# Altium PCB drive.PcbDoc
Units mil, origin at the board's own origin, x right, y up, seen from the top; angles counter-clockwise.
Board outline 6000 x 4000 mil, 2 copper layers (Top Layer, Bottom Layer); 73 components, 49 nets, 211 pads, 63 vias.
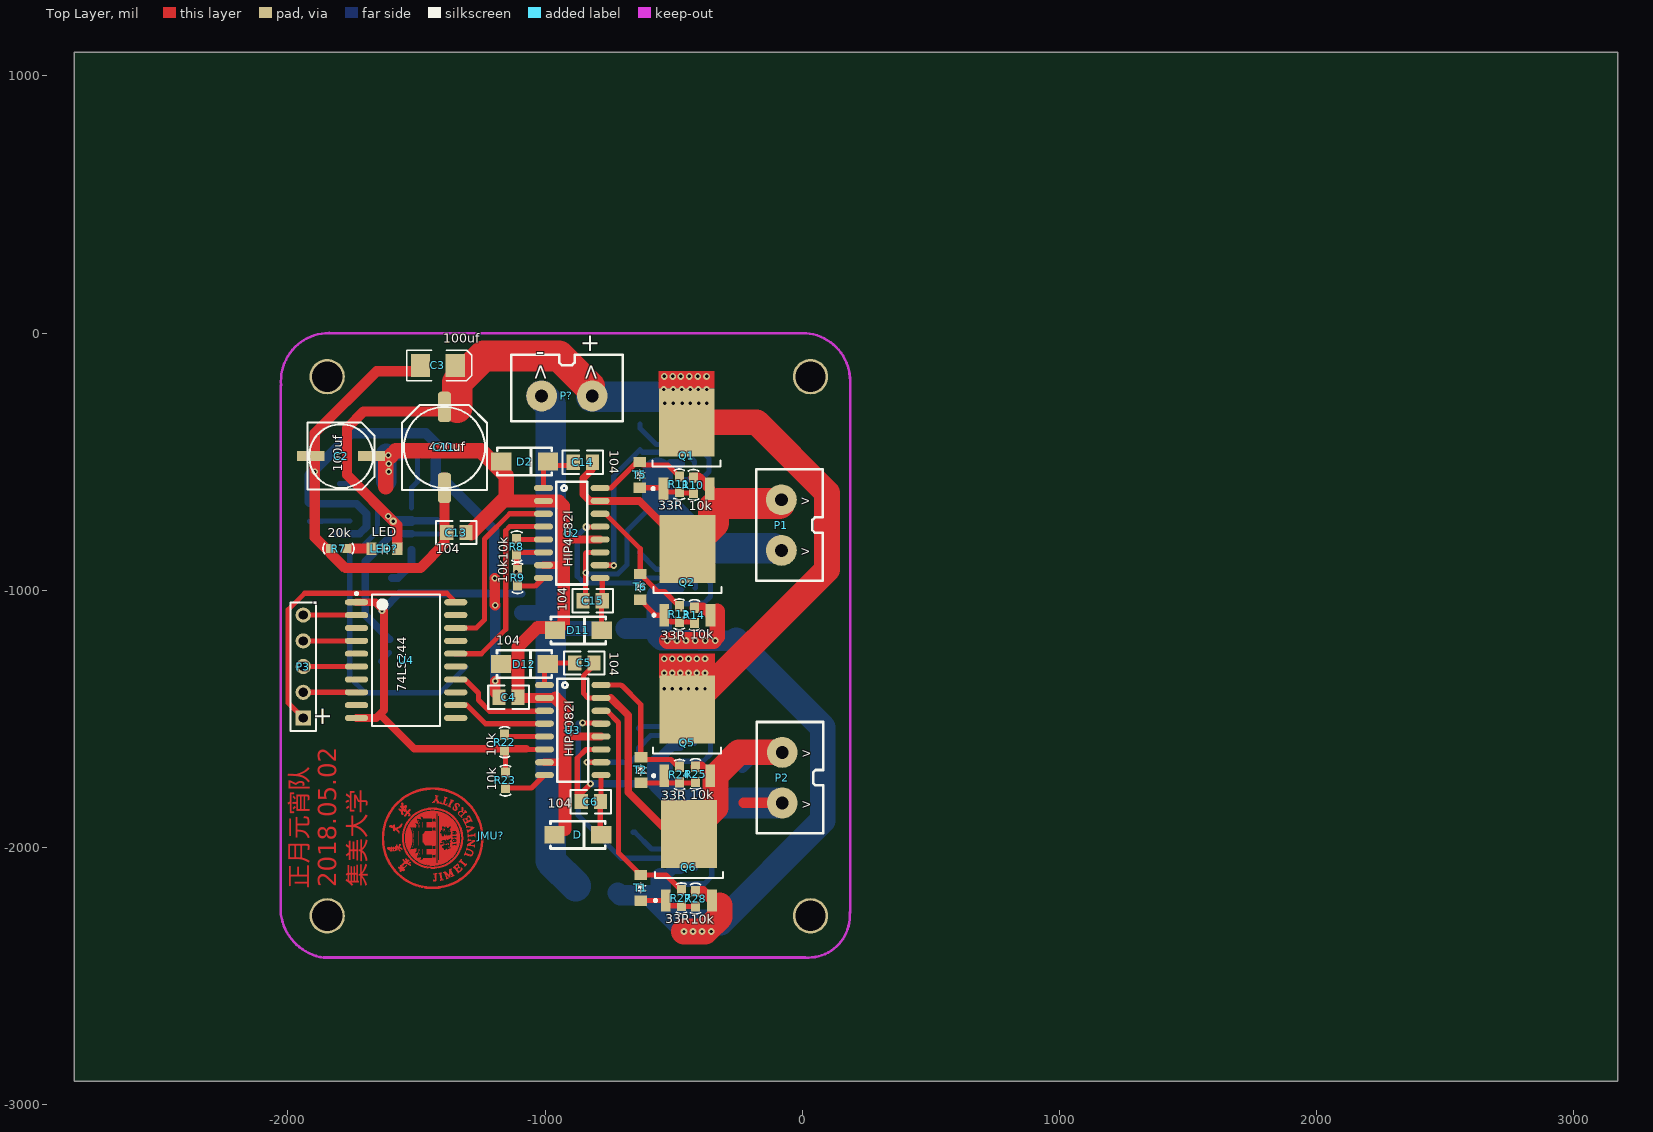
[diagram p0: Top Layer view]
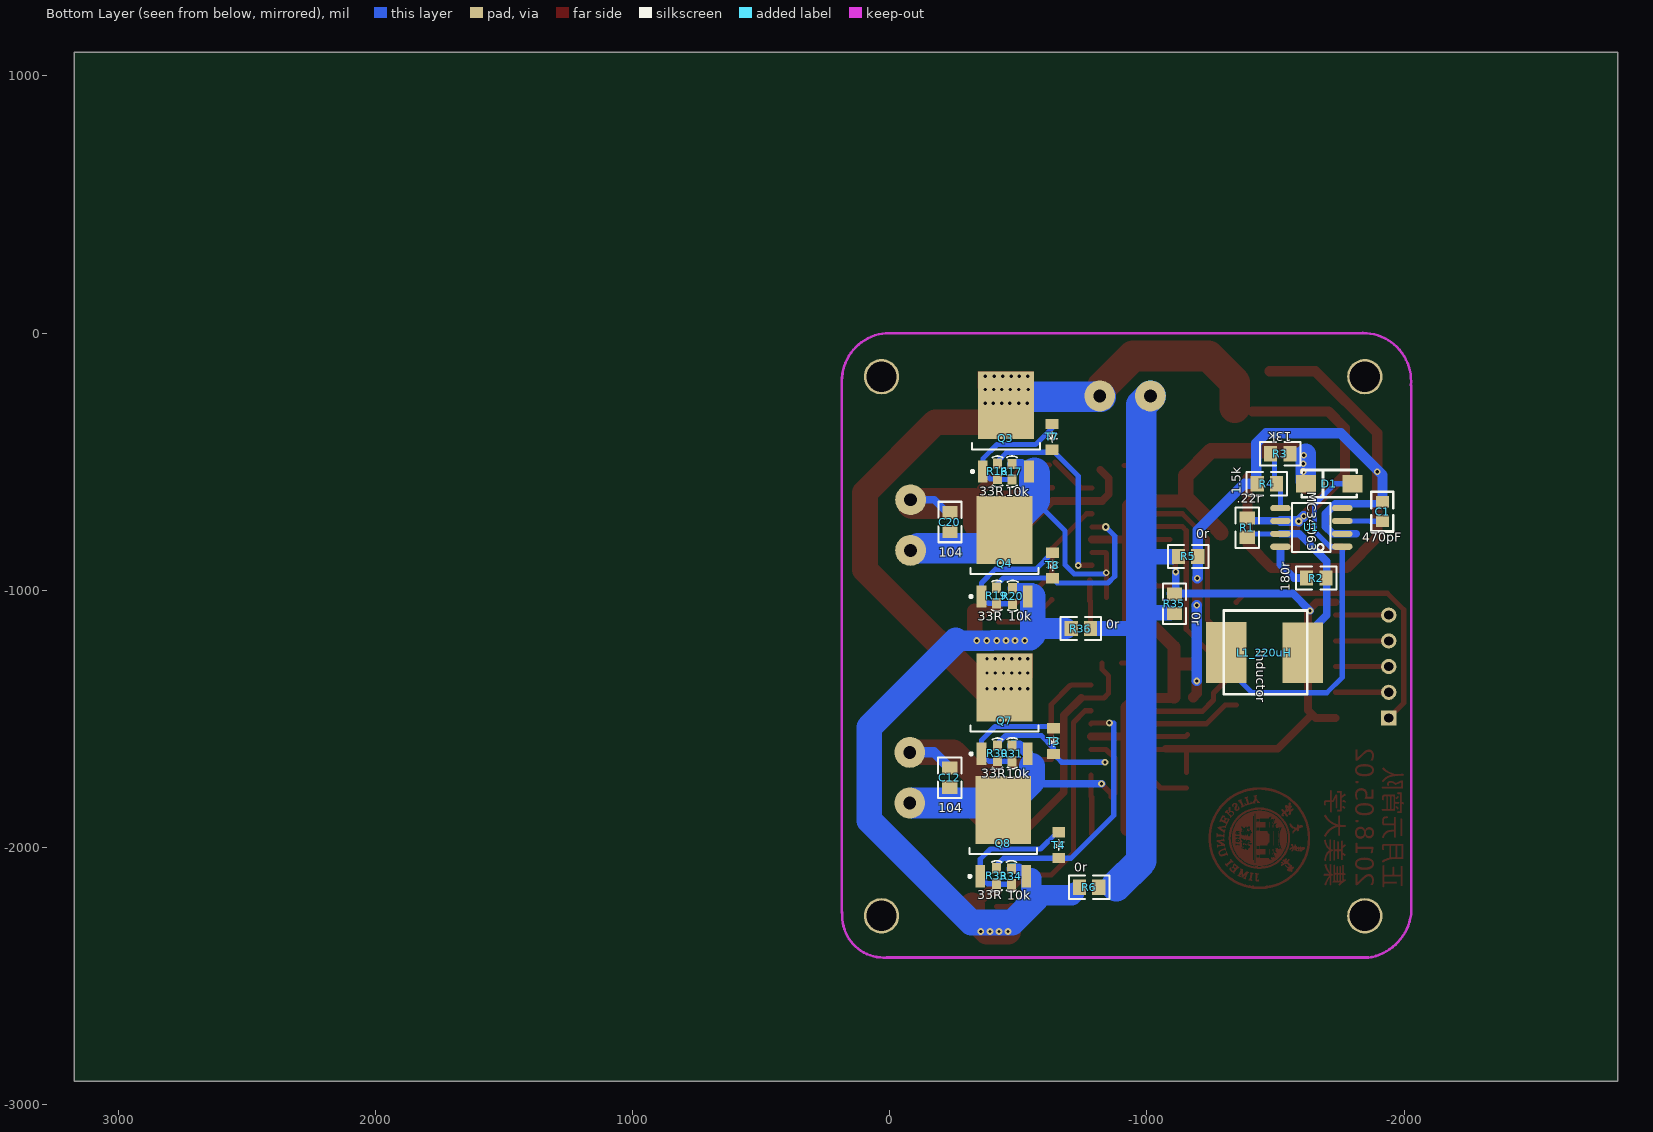
[diagram p1: Bottom Layer view, seen from below]
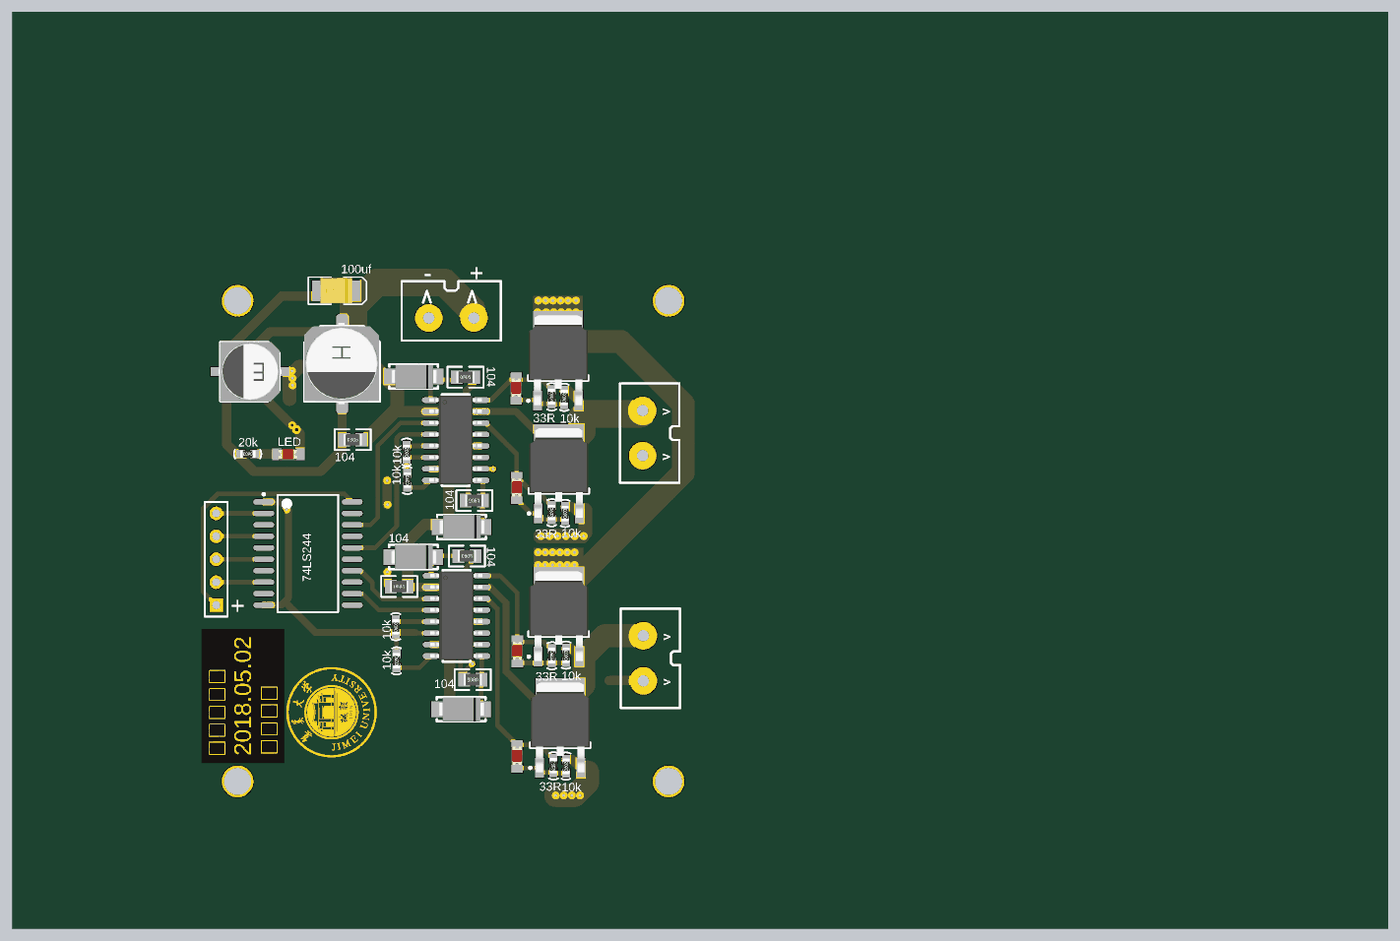
[diagram p2: 3D render of the assembled board from above, using the file's embedded part models]
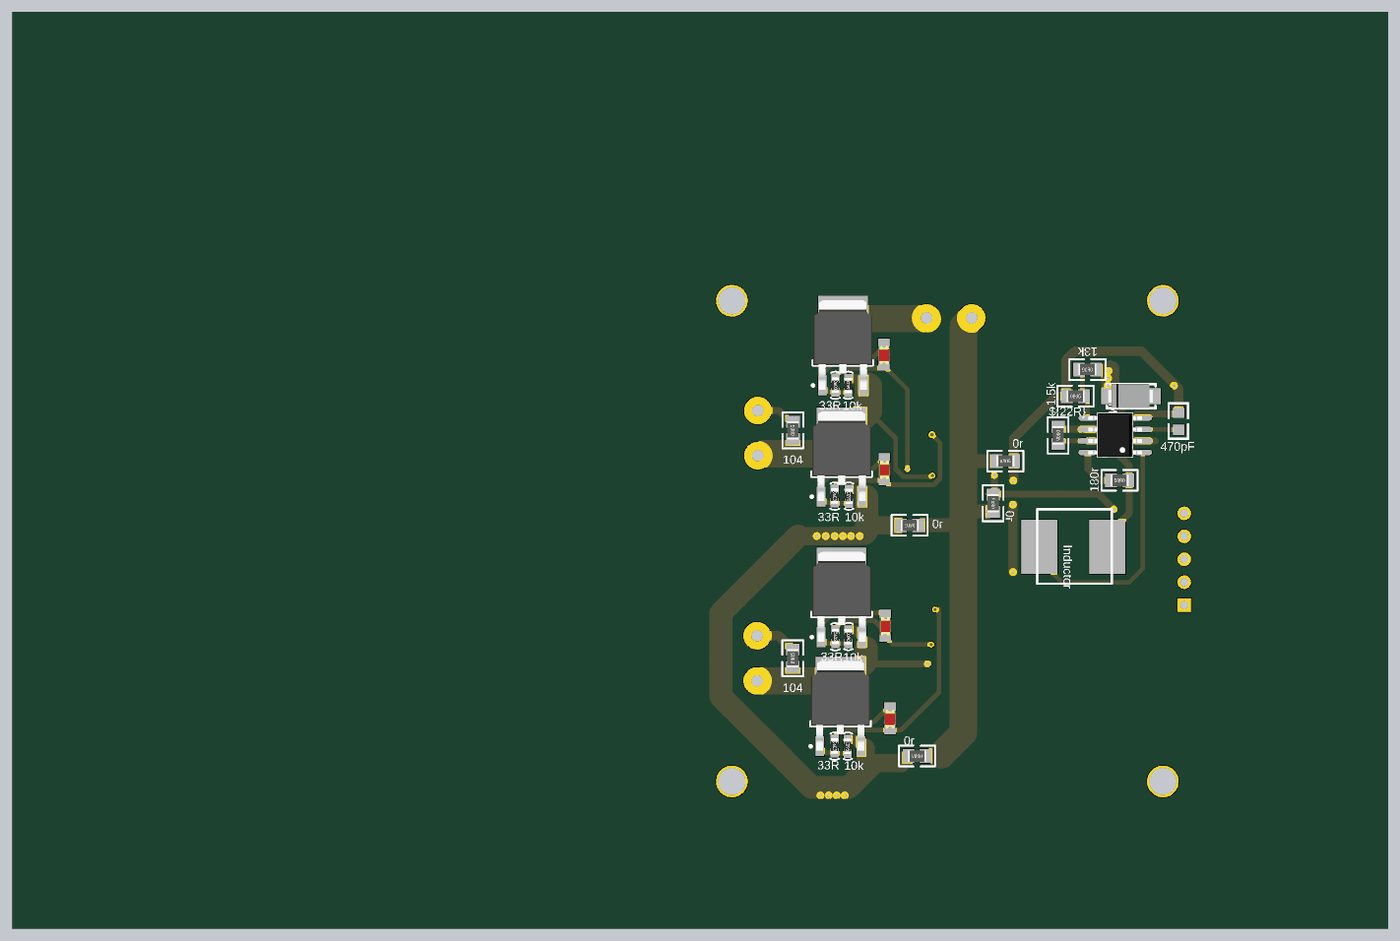
[diagram p3: 3D render of the assembled board from below, using the file's embedded part models]

## Layer stack, top to bottom
Top Solder: solder mask 0.4, Solder Resist, Dk 3.5
Top Layer: signal copper 1.4
Dielectric 1: dielectric 12.6, FR-4, Dk 4.8
Bottom Layer: signal copper 1.4
Bottom Solder: solder mask 0.4, Solder Resist, Dk 3.5

## Board outline
-2830,-2908 3170,-2908 3170,1092 -2830,1092

## Design rules (kind name [scope] priority, off if disabled: settings)
Clearance [All] p1: gap=10
PolygonConnect [All] p1: connectstyle=Relief reliefconductorwidth=10 reliefentries=4 polygonreliefangle="90 Angle" airgapwidth=10
RoutingVias [All] p1: holewidth=28 width=50 viastyle="Through Hole" minholewidth=28 minwidth=50 maxholewidth=28 maxwidth=50
SolderMaskExpansion [All] p1: expansion=4
Width [All] p1: maxlimit=150 minlimit=10 preferedwidth=20 minimp=50.000000 maximp=50.000000 favimp=50.000000
30 further rules are at their usual default settings.

## Components (designator, comment, footprint, x,y, rotation, side; value= is the part's Value field where it differs from the comment)
C1 "470pF" 0805#1 -1916,-731 r90 bottom
C2 "100uf" ED6.3 -1793,-478 r180 top
C3 "100uf" "pol cap(10uF)" -1537,-55 r0 top
C4 "104" 0805#2 -1142,-1410 r0 top
C5 "104" 0805#2 -847,-1277 r0 top
C6 "104" 0805#2 -822,-1826 r180 top
C11 "470uf" ED8 -1391,-444 r270 top
C12 "104" 0805#2 -228,-1728 r90 bottom
C13 "104" 0805#2 -1345,-770 r0 top
C14 "104" 0805#2 -853,-497 r0 top
C15 "104" 0805#2 -815,-1045 r180 top
C20 "104" 0805#2 -229,-734 r90 bottom
D "二极管" 二极管 -868,-1950 r0 top
D1 "二极管" 二极管 -1704,-585 r0 bottom
D2 "D" 二极管 -1075,-499 r0 top
D11 "二极管" 二极管 -866,-1155 r0 top
D12 "二极管" 二极管 -1076,-1286 r0 top
JMU? "LOGO(JMU)" JMU_logo（1） -1210,-1954 r90 top
L1_220uH "Inductor" 电感8*8 -1605,-1242 r270 bottom
LED? "LED" LED(0805) -1625,-838 r180 top
P1 "接线端子" 接线端子 -186,-966 r90 top
P2 "" 接线端子 -183,-1948 r90 top
P3 "Header 5" HDR1X5 -1940,-1496 r90 top
P? "电源接线端子" 接线端子 -695,-349 r180 top
Q1 "IR7843" "TO-252  mos管" -449.49,-431.19 r90 top
Q2 "IR7843" "TO-252  mos管" -446.49,-923.19 r90 top
Q3 "IR7843" "TO-252  mos管" -451.76,-364.77 r90 bottom
Q4 "IR7843" "TO-252  mos管" -446.49,-850.19 r90 bottom
Q5 "IR7843" "TO-252  mos管" -447.49,-1547.19 r90 top
Q6 "IR7843" "TO-252  mos管" -440.49,-2032.19 r90 top
Q7 "IR7843" "TO-252  mos管" -446.49,-1462.19 r90 bottom
Q8 "IR7843" "TO-252  mos管" -441.49,-1938.19 r90 bottom
R1 ".22r" 0805#2 -1395,-756 r270 bottom
R2 "180r" 0805#2 -1658,-957 r0 bottom
R3 "13k" 0805#2 -1518,-474 r0 bottom
R4 "1.5k" 0805#2 -1466,-580 r180 bottom
R5 "0r" 0805#2 -1160,-863 r180 bottom
R6 "0r" 0805#2 -775,-2159 r0 bottom
R7 "20k" 0603 -1797,-837 r180 top
R8 "10k" 0603 -1110,-835 r90 top
R9 "10k" 0603 -1107,-946 r270 top
R10 "10k" 0603 -423,-596 r90 top
R11 "33R" 0603 -478,-582 r270 top
R13 "33R" 0603 -478,-1087 r270 top
R14 "10k" 0603 -419,-1102 r90 top
R16 "33R" 0603 -419.28,-531.58 r270 bottom
R17 "10k" 0603 -475.28,-543.58 r90 bottom
R19 "33R" 0603 -416,-1015 r270 bottom
R20 "10k" 0603 -478,-1027 r90 bottom
R22 "10k" 0603 -1157,-1596 r90 top
R23 "10k" 0603 -1154,-1733 r270 top
R24 "33R" 0603 -477,-1711 r270 top
R25 "10k" 0603 -415,-1720 r90 top
R27 "33R" 0603 -470,-2191 r270 top
R28 "10k" 0603 -415,-2204 r90 top
R30 "33R" 0603 -419,-1628 r270 bottom
R31 "10k" 0603 -476,-1639 r90 bottom
R33 "33R" 0603 -416,-2105 r270 bottom
R34 "10k" 0603 -473,-2117 r90 bottom
R35 "0r" 0805#2 -1102,-1052 r90 bottom
R36 "0r" 0805#2 -743,-1153 r0 bottom
T1 "二极管" LED(0805) -628,-2156 r90 top
T2 "二极管" LED(0805) -627,-1698 r90 top
T3 "二极管" LED(0805) -637,-1586 r270 bottom
T4 "二极管" LED(0805) -657,-1990 r270 bottom
T5 "二极管" LED(0805) -632,-551 r90 top
T6 "二极管" LED(0805) -630,-986 r90 top
T7 "二极管" LED(0805) -631,-403 r270 bottom
T8 "二极管" LED(0805) -633,-903 r270 bottom
U1 "MC34063" SO8NB -1639,-755 r90 bottom
U2 "HIP4082I" HIP4082I -896,-762 r0 top
U3 "HIP4082I" HIP4082I -892.47,-1528 r0 top
U4 "74LS244" 74LS244D -1540,-1271 r0 top

## Footprints (in the part's own frame and the unit in brackets; to place one, negate y for a bottom-side part, rotate by r counter-clockwise, add the part's x,y. Pads: shape width x height; smd on the part's side, far side on the other; paste and mask are expansions set on the pad)
74LS244D [mm] "SOP-20"
  oval 2.3x0.6 smd: 1(-4.9,5.715) 2(-4.9,4.445) 3(-4.9,3.175) 4(-4.9,1.905) 5(-4.9,0.635) 6(-4.9,-0.635) 7(-4.9,-1.905) 8(-4.9,-3.175) 9(-4.9,-4.445) 10(-4.9,-5.715) 11(4.9,-5.715) 12(4.9,-4.445) 13(4.9,-3.175) 14(4.9,-1.905) 15(4.9,-0.635) 16(4.9,0.635) 17(4.9,1.905) 18(4.9,3.175) 19(4.9,4.445) 20(4.9,5.715)
  silkscreen extent -5.02,-6.5 3.35,6.69, body extent -3.8,-6.5 3.8,6.5, height 2.65
0603 [mil]
  rect 40x35 smd: 1(-25,0) 2(35,0)
  silkscreen extent -54,-20 66,20, body extent -28,-16 38,16, height 22
0805#1 [mil]
  rect 45x50 smd: 1(0,0) 2(75,0)
  silkscreen extent -40,-41 115,44
0805#2 [mil]
  rect 51.18x59.06 smd: 1(-37.4,-5) 2(37.4,-5)
  silkscreen extent -79,-50 79,40, body extent -39,-30 39,20, height 22
ED6.3 [mm]
  rect 2.7x1 smd: 1(-3,0) 2(3,0)
  silkscreen extent -3.3,-3.3 3.3,3.3, body extent -3.5,-3.3 3.5,3.3, height 5.2
ED8 [mm]
  rrect50% 3x1.3 smd: 1(-4,0) 2(4,0)
  silkscreen extent -4.2,-4.2 4.2,4.2, body extent -4.52,-4.22 4.48,4.08, height 10.5
HDR1X5 [mm] "Connector; Header; 5 Position"
  rect 1.5x1.5 hole 0.9: 1(0,0)
  round 1.5 hole 0.9: 2(2.54,0) 3(5.08,0) 4(7.62,0) 5(10.16,0)
  silkscreen extent -1.27,-1.27 11.43,1.27
HIP4082I [mil]
  oval 74x24 smd: 1(-110,160) 2(-110,110) 3(-110,60) 4(-110,10) 5(-110,-40) 6(-110,-90) 7(-110,-140) 8(-110,-190) 9(110,-190) 10(110,-140) 11(110,-90) 12(110,-40) 13(110,10) 14(110,60) 15(110,110) 16(110,160)
  silkscreen extent -60,-215 60,185, body extent -115,-207 113,179, height 69
JMU_logo（1） [mil]
  Top Layer region: 917 vertices and 1 holes, not listed, extent -205.79,30.64 187.21,423.64
  Top Layer region: 557 vertices and 1 holes, not listed, extent -127.79,108.64 109.21,345.64
  Top Layer region: 309 vertices and 19 holes, not listed, extent -115.79,217.64 97.21,333.64
  Top Layer region: 261 vertices and 22 holes, not listed, extent -114.79,120.64 96.21,214.64
  Top Layer region: 251 vertices and 0 holes, not listed, extent 75.21,313.64 128.21,352.64
  Top Layer region: 219 vertices and 1 holes, not listed, extent -138.79,311.64 -91.79,360.64
  Top Layer region: 241 vertices and 4 holes, not listed, extent -60.79,345.64 -33.79,402.64
  Top Layer region: 155 vertices and 0 holes, not listed, extent 10.21,345.64 47.21,395.64
  Top Layer region: 195 vertices and 0 holes, not listed, extent -168.79,142.64 -127.79,185.64
  Top Layer region: 139 vertices and 1 holes, not listed, extent 71.21,93.64 111.21,127.64
  Top Layer region: -37.79,91.64 -32.79,91.64 -32.79,90.64 -31.79,90.64 -31.79,88.64 -30.79,88.64 -30.79,86.64 -29.79,86.64 -29.79,85.64 -28.79,85.64 -28.79,83.64 -27.79,83.64 -27.79,82.64 -26.79,82.64 -26.79,80.64 -25.79,80.64 -25.79,78.64 -24.79,78.64 -24.79,77.64 -23.79,77.64 -23.79,75.64 -22.79,75.64 -22.79,73.64 -21.79,73.64 -21.79,72.64 -20.79,72.64 -20.79,70.64 -19.79,70.64 -19.79,78.64 -18.79,78.64 -18.79,87.64 -21.79,87.64 -21.79,89.64 -14.79,89.64 -14.79,88.64 -10.79,88.64 -10.79,87.64 -11.79,87.64 -11.79,86.64 -14.79,86.64 -14.79,84.64 -15.79,84.64 -15.79,78.64 -16.79,78.64 -16.79,70.64 -17.79,70.64 -17.79,62.64 -18.79,62.64 -18.79,60.64 -20.79,60.64 -20.79,62.64 -21.79,62.64 -21.79,63.64 -22.79,63.64 -22.79,65.64 -23.79,65.64 -23.79,66.64 -24.79,66.64 -24.79,68.64 -25.79,68.64 -25.79,70.64 -26.79,70.64 -26.79,71.64 -27.79,71.64 -27.79,73.64 -28.79,73.64 -28.79,74.64 -29.79,74.64 -29.79,76.64 -30.79,76.64 -30.79,78.64 -31.79,78.64 -31.79,80.64 -32.79,80.64 -32.79,81.64 -33.79,81.64 -33.79,83.64 -34.79,83.64 -34.79,79.64 -35.79,79.64 -35.79,71.64 -36.79,71.64 -36.79,64.64 -33.79,64.64 -33.79,62.64 -41.79,62.64 -41.79,63.64 -44.79,63.64 -44.79,64.64 -43.79,64.64 -43.79,65.64 -40.79,65.64 -40.79,66.64 -39.79,66.64 -39.79,71.64 -38.79,71.64 -38.79,79.64 -37.79,79.64 -37.79,86.64 -36.79,86.64 -36.79,87.64 -37.79,87.64 -37.79,89.64 -39.79,89.64 -39.79,90.64 -40.79,90.64 -40.79,92.64 -37.79,92.64
  Top Layer region: 177 vertices and 0 holes, not listed, extent 43.21,73.64 78.21,109.64
  Top Layer region: 215 vertices and 0 holes, not listed, extent -145.79,111.64 -108.79,148.64
  Top Layer region: -73.79,103.64 -71.79,103.64 -71.79,102.64 -68.79,102.64 -68.79,101.64 -66.79,101.64 -66.79,100.64 -63.79,100.64 -63.79,99.64 -62.79,99.64 -62.79,97.64 -64.79,97.64 -64.79,98.64 -66.79,98.64 -66.79,97.64 -67.79,97.64 -67.79,95.64 -68.79,95.64 -68.79,92.64 -69.79,92.64 -69.79,89.64 -70.79,89.64 -70.79,87.64 -71.79,87.64 -71.79,84.64 -72.79,84.64 -72.79,81.64 -73.79,81.64 -73.79,76.64 -72.79,76.64 -72.79,75.64 -71.79,75.64 -71.79,74.64 -70.79,74.64 -70.79,73.64 -68.79,73.64 -68.79,72.64 -62.79,72.64 -62.79,73.64 -61.79,73.64 -61.79,74.64 -60.79,74.64 -60.79,75.64 -59.79,75.64 -59.79,76.64 -58.79,76.64 -58.79,78.64 -57.79,78.64 -57.79,81.64 -56.79,81.64 -56.79,84.64 -55.79,84.64 -55.79,86.64 -54.79,86.64 -54.79,89.64 -53.79,89.64 -53.79,93.64 -54.79,93.64 -54.79,94.64 -55.79,94.64 -55.79,96.64 -53.79,96.64 -53.79,95.64 -50.79,95.64 -50.79,94.64 -48.79,94.64 -48.79,93.64 -45.79,93.64 -45.79,91.64 -49.79,91.64 -49.79,90.64 -50.79,90.64 -50.79,88.64 -51.79,88.64 -51.79,86.64 -52.79,86.64 -52.79,83.64 -53.79,83.64 -53.79,80.64 -54.79,80.64 -54.79,78.64 -55.79,78.64 -55.79,76.64 -56.79,76.64 -56.79,74.64 -57.79,74.64 -57.79,72.64 -59.79,72.64 -59.79,71.64 -60.79,71.64 -60.79,70.64 -62.79,70.64 -62.79,69.64 -68.79,69.64 -68.79,70.64 -71.79,70.64 -71.79,71.64 -73.79,71.64 -73.79,72.64 -75.79,72.64 -75.79,73.64 -76.79,73.64 -76.79,74.64 -77.79,74.64 -77.79,76.64 -78.79,76.64 -78.79,83.64 -77.79,83.64 -77.79,86.64 -76.79,86.64 -76.79,89.64 -75.79,89.64 -75.79,91.64 -74.79,91.64 -74.79,94.64 -73.79,94.64 -73.79,97.64 -72.79,97.64 -72.79,101.64 -74.79,101.64 -74.79,104.64 -73.79,104.64
  Top Layer region: 130.21,227.64 131.21,227.64 131.21,224.64 132.21,224.64 132.21,223.64 134.21,223.64 134.21,222.64 135.21,222.64 135.21,221.64 136.21,221.64 136.21,220.64 137.21,220.64 137.21,219.64 139.21,219.64 139.21,218.64 140.21,218.64 140.21,217.64 141.21,217.64 141.21,216.64 142.21,216.64 142.21,215.64 144.21,215.64 144.21,214.64 152.21,214.64 152.21,213.64 154.21,213.64 154.21,214.64 155.21,214.64 155.21,217.64 157.21,217.64 157.21,212.64 156.21,212.64 156.21,204.64 154.21,204.64 154.21,207.64 153.21,207.64 153.21,208.64 148.21,208.64 148.21,209.64 143.21,209.64 143.21,208.64 141.21,208.64 141.21,207.64 139.21,207.64 139.21,206.64 137.21,206.64 137.21,205.64 135.21,205.64 135.21,204.64 134.21,204.64 134.21,203.64 132.21,203.64 132.21,202.64 130.21,202.64 130.21,201.64 129.21,201.64 129.21,200.64 128.21,200.64 128.21,198.64 126.21,198.64 126.21,206.64 127.21,206.64 127.21,211.64 129.21,211.64 129.21,208.64 131.21,208.64 131.21,209.64 133.21,209.64 133.21,210.64 135.21,210.64 135.21,211.64 137.21,211.64 137.21,212.64 139.21,212.64 139.21,213.64 140.21,213.64 140.21,214.64 139.21,214.64 139.21,215.64 138.21,215.64 138.21,216.64 136.21,216.64 136.21,217.64 135.21,217.64 135.21,218.64 134.21,218.64 134.21,219.64 132.21,219.64 132.21,220.64 130.21,220.64 130.21,218.64 128.21,218.64 128.21,224.64 129.21,224.64 129.21,228.64 130.21,228.64
  Top Layer region: 106.21,148.64 108.21,148.64 108.21,147.64 110.21,147.64 110.21,146.64 112.21,146.64 112.21,144.64 104.21,144.64 104.21,143.64 103.21,143.64 103.21,142.64 102.21,142.64 102.21,141.64 101.21,141.64 101.21,138.64 102.21,138.64 102.21,137.64 103.21,137.64 103.21,136.64 108.21,136.64 108.21,137.64 110.21,137.64 110.21,138.64 112.21,138.64 112.21,139.64 115.21,139.64 115.21,140.64 123.21,140.64 123.21,139.64 124.21,139.64 124.21,138.64 125.21,138.64 125.21,137.64 126.21,137.64 126.21,136.64 127.21,136.64 127.21,128.64 126.21,128.64 126.21,127.64 125.21,127.64 125.21,125.64 124.21,125.64 124.21,124.64 123.21,124.64 123.21,123.64 121.21,123.64 121.21,120.64 119.21,120.64 119.21,121.64 117.21,121.64 117.21,122.64 115.21,122.64 115.21,123.64 112.21,123.64 112.21,125.64 120.21,125.64 120.21,126.64 122.21,126.64 122.21,127.64 123.21,127.64 123.21,128.64 124.21,128.64 124.21,132.64 123.21,132.64 123.21,134.64 120.21,134.64 120.21,135.64 118.21,135.64 118.21,134.64 115.21,134.64 115.21,133.64 113.21,133.64 113.21,132.64 111.21,132.64 111.21,131.64 107.21,131.64 107.21,130.64 105.21,130.64 105.21,131.64 102.21,131.64 102.21,132.64 101.21,132.64 101.21,133.64 100.21,133.64 100.21,134.64 99.21,134.64 99.21,136.64 98.21,136.64 98.21,140.64 99.21,140.64 99.21,142.64 100.21,142.64 100.21,144.64 101.21,144.64 101.21,145.64 102.21,145.64 102.21,146.64 104.21,146.64 104.21,149.64 106.21,149.64
  Top Layer region: 40.21,95.64 39.21,95.64 39.21,94.64 38.21,94.64 38.21,90.64 37.21,90.64 37.21,84.64 36.21,84.64 36.21,78.64 35.21,78.64 35.21,73.64 34.21,73.64 34.21,72.64 35.21,72.64 35.21,71.64 34.21,71.64 34.21,66.64 33.21,66.64 33.21,64.64 32.21,64.64 32.21,65.64 31.21,65.64 31.21,66.64 30.21,66.64 30.21,67.64 29.21,67.64 29.21,68.64 28.21,68.64 28.21,70.64 27.21,70.64 27.21,71.64 26.21,71.64 26.21,72.64 25.21,72.64 25.21,74.64 24.21,74.64 24.21,75.64 23.21,75.64 23.21,76.64 22.21,76.64 22.21,78.64 21.21,78.64 21.21,79.64 20.21,79.64 20.21,81.64 19.21,81.64 19.21,82.64 18.21,82.64 18.21,83.64 17.21,83.64 17.21,85.64 16.21,85.64 16.21,86.64 15.21,86.64 15.21,87.64 14.21,87.64 14.21,88.64 11.21,88.64 11.21,90.64 14.21,90.64 14.21,91.64 18.21,91.64 18.21,92.64 22.21,92.64 22.21,93.64 23.21,93.64 23.21,90.64 20.21,90.64 20.21,89.64 21.21,89.64 21.21,87.64 22.21,87.64 22.21,85.64 23.21,85.64 23.21,84.64 24.21,84.64 24.21,83.64 25.21,83.64 25.21,81.64 26.21,81.64 26.21,80.64 27.21,80.64 27.21,79.64 28.21,79.64 28.21,77.64 29.21,77.64 29.21,76.64 30.21,76.64 30.21,75.64 31.21,75.64 31.21,74.64 32.21,74.64 32.21,79.64 33.21,79.64 33.21,84.64 34.21,84.64 34.21,91.64 35.21,91.64 35.21,93.64 31.21,93.64 31.21,95.64 34.21,95.64 34.21,96.64 39.21,96.64 39.21,97.64 40.21,97.64
  Top Layer region: 128.21,195.64 131.21,195.64 131.21,194.64 133.21,194.64 133.21,192.64 127.21,192.64 127.21,190.64 126.21,190.64 126.21,188.64 125.21,188.64 125.21,186.64 126.21,186.64 126.21,185.64 129.21,185.64 129.21,184.64 132.21,184.64 132.21,183.64 136.21,183.64 136.21,182.64 139.21,182.64 139.21,181.64 142.21,181.64 142.21,180.64 145.21,180.64 145.21,179.64 148.21,179.64 148.21,180.64 149.21,180.64 149.21,182.64 151.21,182.64 151.21,179.64 150.21,179.64 150.21,176.64 149.21,176.64 149.21,172.64 148.21,172.64 148.21,169.64 146.21,169.64 146.21,173.64 145.21,173.64 145.21,174.64 143.21,174.64 143.21,175.64 140.21,175.64 140.21,176.64 137.21,176.64 137.21,177.64 134.21,177.64 134.21,178.64 130.21,178.64 130.21,179.64 127.21,179.64 127.21,180.64 124.21,180.64 124.21,181.64 123.21,181.64 123.21,178.64 122.21,178.64 122.21,174.64 123.21,174.64 123.21,172.64 125.21,172.64 125.21,171.64 126.21,171.64 126.21,170.64 122.21,170.64 122.21,171.64 119.21,171.64 119.21,172.64 118.21,172.64 118.21,174.64 119.21,174.64 119.21,178.64 120.21,178.64 120.21,181.64 121.21,181.64 121.21,184.64 122.21,184.64 122.21,187.64 123.21,187.64 123.21,190.64 124.21,190.64 124.21,194.64 125.21,194.64 125.21,196.64 128.21,196.64
  Top Layer region: -170.79,223.64 -169.79,223.64 -169.79,221.64 -170.79,221.64 -170.79,220.64 -171.79,220.64 -171.79,219.64 -173.79,219.64 -173.79,217.64 -162.79,217.64 -162.79,218.64 -150.79,218.64 -150.79,219.64 -148.79,219.64 -148.79,223.64 -146.79,223.64 -146.79,216.64 -145.79,216.64 -145.79,210.64 -146.79,210.64 -146.79,209.64 -147.79,209.64 -147.79,212.64 -148.79,212.64 -148.79,213.64 -158.79,213.64 -158.79,212.64 -172.79,212.64 -172.79,213.64 -173.79,213.64 -173.79,214.64 -174.79,214.64 -174.79,215.64 -175.79,215.64 -175.79,217.64 -176.79,217.64 -176.79,221.64 -175.79,221.64 -175.79,223.64 -174.79,223.64 -174.79,224.64 -170.79,224.64
  Top Layer region: 117.21,168.64 118.21,168.64 118.21,167.64 117.21,167.64 117.21,164.64 118.21,164.64 118.21,163.64 120.21,163.64 120.21,162.64 122.21,162.64 122.21,161.64 124.21,161.64 124.21,160.64 126.21,160.64 126.21,159.64 128.21,159.64 128.21,158.64 130.21,158.64 130.21,157.64 132.21,157.64 132.21,156.64 134.21,156.64 134.21,155.64 136.21,155.64 136.21,154.64 139.21,154.64 139.21,155.64 140.21,155.64 140.21,156.64 142.21,156.64 142.21,155.64 141.21,155.64 141.21,153.64 140.21,153.64 140.21,150.64 139.21,150.64 139.21,148.64 138.21,148.64 138.21,146.64 137.21,146.64 137.21,144.64 135.21,144.64 135.21,149.64 134.21,149.64 134.21,150.64 132.21,150.64 132.21,151.64 129.21,151.64 129.21,152.64 128.21,152.64 128.21,153.64 126.21,153.64 126.21,154.64 124.21,154.64 124.21,155.64 122.21,155.64 122.21,156.64 120.21,156.64 120.21,157.64 118.21,157.64 118.21,158.64 116.21,158.64 116.21,159.64 114.21,159.64 114.21,158.64 113.21,158.64 113.21,157.64 112.21,157.64 112.21,156.64 111.21,156.64 111.21,157.64 110.21,157.64 110.21,158.64 111.21,158.64 111.21,160.64 112.21,160.64 112.21,162.64 113.21,162.64 113.21,164.64 114.21,164.64 114.21,166.64 115.21,166.64 115.21,168.64 116.21,168.64 116.21,169.64 117.21,169.64
  Top Layer region: -144.79,199.64 -143.79,199.64 -143.79,194.64 -142.79,194.64 -142.79,190.64 -144.79,190.64 -144.79,192.64 -145.79,192.64 -145.79,193.64 -150.79,193.64 -150.79,192.64 -155.79,192.64 -155.79,191.64 -160.79,191.64 -160.79,190.64 -165.79,190.64 -165.79,189.64 -168.79,189.64 -168.79,188.64 -169.79,188.64 -169.79,184.64 -170.79,184.64 -170.79,185.64 -171.79,185.64 -171.79,190.64 -172.79,190.64 -172.79,195.64 -173.79,195.64 -173.79,197.64 -172.79,197.64 -172.79,198.64 -171.79,198.64 -171.79,196.64 -170.79,196.64 -170.79,195.64 -169.79,195.64 -169.79,194.64 -168.79,194.64 -168.79,195.64 -162.79,195.64 -162.79,196.64 -158.79,196.64 -158.79,197.64 -152.79,197.64 -152.79,198.64 -148.79,198.64 -148.79,199.64 -146.79,199.64 -146.79,203.64 -144.79,203.64
  Top Layer region: -100.79,123.64 -99.79,123.64 -99.79,122.64 -98.79,122.64 -98.79,121.64 -97.79,121.64 -97.79,120.64 -96.79,120.64 -96.79,119.64 -94.79,119.64 -94.79,118.64 -93.79,118.64 -93.79,117.64 -92.79,117.64 -92.79,116.64 -91.79,116.64 -91.79,114.64 -93.79,114.64 -93.79,115.64 -96.79,115.64 -96.79,114.64 -97.79,114.64 -97.79,113.64 -98.79,113.64 -98.79,112.64 -99.79,112.64 -99.79,111.64 -100.79,111.64 -100.79,109.64 -101.79,109.64 -101.79,108.64 -102.79,108.64 -102.79,107.64 -103.79,107.64 -103.79,106.64 -104.79,106.64 -104.79,105.64 -105.79,105.64 -105.79,103.64 -106.79,103.64 -106.79,102.64 -107.79,102.64 -107.79,101.64 -108.79,101.64 -108.79,100.64 -109.79,100.64 -109.79,98.64 -110.79,98.64 -110.79,96.64 -109.79,96.64 -109.79,95.64 -108.79,95.64 -108.79,94.64 -109.79,94.64 -109.79,93.64 -110.79,93.64 -110.79,94.64 -111.79,94.64 -111.79,95.64 -112.79,95.64 -112.79,96.64 -113.79,96.64 -113.79,97.64 -115.79,97.64 -115.79,98.64 -116.79,98.64 -116.79,99.64 -117.79,99.64 -117.79,100.64 -118.79,100.64 -118.79,101.64 -119.79,101.64 -119.79,102.64 -116.79,102.64 -116.79,101.64 -114.79,101.64 -114.79,102.64 -113.79,102.64 -113.79,103.64 -112.79,103.64 -112.79,104.64 -111.79,104.64 -111.79,106.64 -110.79,106.64 -110.79,107.64 -109.79,107.64 -109.79,108.64 -108.79,108.64 -108.79,109.64 -107.79,109.64 -107.79,111.64 -106.79,111.64 -106.79,112.64 -105.79,112.64 -105.79,113.64 -104.79,113.64 -104.79,114.64 -103.79,114.64 -103.79,115.64 -102.79,115.64 -102.79,117.64 -101.79,117.64 -101.79,118.64 -100.79,118.64 -100.79,121.64 -101.79,121.64 -101.79,122.64 -102.79,122.64 -102.79,123.64 -101.79,123.64 -101.79,124.64 -100.79,124.64
  Top Layer region: 7.21,87.64 4.21,87.64 4.21,86.64 3.21,86.64 3.21,78.64 4.21,78.64 4.21,64.64 5.21,64.64 5.21,62.64 9.21,62.64 9.21,61.64 8.21,61.64 8.21,60.64 -4.79,60.64 -4.79,61.64 -3.79,61.64 -3.79,62.64 -0.79,62.64 -0.79,72.64 -1.79,72.64 -1.79,86.64 -3.79,86.64 -3.79,87.64 -5.79,87.64 -5.79,89.64 7.21,89.64
  Top Layer region: 105.21,357.64 106.21,357.64 106.21,355.64 105.21,355.64 105.21,354.64 104.21,354.64 104.21,353.64 103.21,353.64 103.21,351.64 102.21,351.64 102.21,350.64 101.21,350.64 101.21,349.64 99.21,349.64 99.21,348.64 97.21,348.64 97.21,349.64 96.21,349.64 96.21,352.64 97.21,352.64 97.21,354.64 98.21,354.64 98.21,355.64 99.21,355.64 99.21,356.64 100.21,356.64 100.21,357.64 101.21,357.64 101.21,359.64 105.21,359.64
  Top Layer region: -40.79,358.64 -37.79,358.64 -37.79,357.64 -34.79,357.64 -34.79,356.64 -32.79,356.64 -32.79,355.64 -31.79,355.64 -31.79,352.64 -32.79,352.64 -32.79,351.64 -36.79,351.64 -36.79,352.64 -37.79,352.64 -37.79,354.64 -39.79,354.64 -39.79,355.64 -41.79,355.64 -41.79,356.64 -42.79,356.64 -42.79,358.64 -41.79,358.64 -41.79,359.64 -40.79,359.64
  Top Layer region: -89.79,330.64 -88.79,330.64 -88.79,329.64 -89.79,329.64 -89.79,327.64 -90.79,327.64 -90.79,326.64 -92.79,326.64 -92.79,325.64 -93.79,325.64 -93.79,324.64 -95.79,324.64 -95.79,325.64 -94.79,325.64 -94.79,327.64 -95.79,327.64 -95.79,326.64 -97.79,326.64 -97.79,328.64 -96.79,328.64 -96.79,329.64 -95.79,329.64 -95.79,330.64 -94.79,330.64 -94.79,331.64 -92.79,331.64 -92.79,332.64 -89.79,332.64
  Top Layer region: -103.79,318.64 -101.79,318.64 -101.79,313.64 -102.79,313.64 -102.79,312.64 -104.79,312.64 -104.79,313.64 -105.79,313.64 -105.79,314.64 -106.79,314.64 -106.79,319.64 -103.79,319.64
  Top Layer region: -29.79,165.64 -30.79,165.64 -30.79,164.64 -31.79,164.64 -31.79,163.64 -33.79,163.64 -33.79,164.64 -34.79,164.64 -34.79,166.64 -31.79,166.64 -31.79,167.64 -29.79,167.64
  Top Layer region: -32.79,175.64 -31.79,175.64 -31.79,174.64 -30.79,174.64 -30.79,173.64 -31.79,173.64 -31.79,172.64 -32.79,172.64 -32.79,171.64 -33.79,171.64 -33.79,176.64 -32.79,176.64
  Top Layer region: -42.79,162.64 -43.79,162.64 -43.79,161.64 -46.79,161.64 -46.79,163.64 -44.79,163.64 -44.79,164.64 -42.79,164.64
  Top Layer region: 27.21,181.64 26.21,181.64 26.21,180.64 24.21,180.64 24.21,183.64 27.21,183.64
  Top Layer region: 8.21,175.64 7.21,175.64 7.21,176.64 8.21,176.64
LED(0805) [mil]
  rect 40x50 smd: 1(-50,0) 2(50,0)
  silkscreen extent -20,-20 20,20, body extent -37,-24 43,25, height 43
"pol cap(10uF)" [mil]
  rect 75x90 smd: 1(187.5,-70) 2(52.5,-70)
  silkscreen extent -1,-129 252,-11, body extent 51,-125 189,-15, height 75
SO8NB [mil]
  oval 24x80 smd: 1(-75,-120) 2(-25,-120) 3(25,-120) 4(75,-120) 5(75,120) 6(25,120) 7(-25,120) 8(-75,120)
  silkscreen extent -95,-75 95,75, body extent -97,-118 96,118, height 61
"TO-252  mos管" [mm]
  rect 2.2x0.95 smd: 1(-4.4,2.28) 3(-4.4,-2.28)
  rect 6.7x5.5 smd: 2(2.15,0)
  silkscreen extent -4.52,-3.35 -1.6,3.43, body extent -4.9,-3.27 5.04,3.27, height 2.39
二极管 [mm] "SS-14/M7"
  rect 2x1.75 smd: 1(-2.413,0) 2(2.187,0)
  silkscreen extent -2.81,-1.35 2.59,1.35, body extent -2.61,-1.34 2.49,1.33, height 2.12
接线端子 [mil]
  round 120 hole 50: 1(121.57,-105) 2(318.43,-105)
  silkscreen extent 3,-265 437,-7
电感8*8 [mm]
  rect 6x4 smd: 1(0,0) 2(-0.025,-7.544)
  silkscreen extent -4.17,-7.77 4.09,0.48

## Part data
C1: library part Cap, "Capacitor"
C2 C11: library part 固态贴片电容, "ED8:470UF  ED6.3:100UF"
C3: library part "pol cap", "通用有极电容"
C4 C5 C6 C12 C13 C14 C15 C20: library part Cap, "无极电容"
D2: library part 二极管
JMU?: library part JMU-LOGO
LED?: "发光二极管"
P2: library part 接线端子
P3: "Header, 5-Pin"
P?: "电源线"
Q1 Q2 Q3 Q4 Q5 Q6 Q7 Q8: library part NMOS-2, "N-Channel Power MOSFET"
R1 R2 R3 R4 R5 R6 R7 R8 R9 R10 R11 R13 R14 R16 R17 R19 R20 R22 R23 R24 R25 R27 R28 R30 R31 R33 R34 R35 R36: library part R

## Free pads (board coordinates)
  round 137.8 hole 118.11: 0(-1847,-2265) 0(-1847,-169) 0(32,-2265) 0(32,-169)

## Via types
v1: diameter 26, hole 13, Top Layer to Bottom Layer, 61 vias
v2: diameter 30, hole 15, Top Layer to Bottom Layer, 2 vias

## Nets (pads, with @x,y where several pads share a name; then routed paths per layer and width w, separated by ;. In a path a pad name is that pad's centre, name@x,y a point inside that pad or via, vN(x,y) a via of type N, cw(c..) or ccw(c..) an arc to the next point about the centre after c; other vN are vias at no path point)
5V: P3.1 U4.20 | length 1136.9
  Top Layer w20: P3.1 -1998,-1438 -1998,-1075 -1934,-1011 -1382.09,-1011 U4.20
12V: C2.1 C4.2 C13.2 D1.2 D2.1 D11.1 D12.1 D.1 R3.1 U2.2 U2.7 U2.12 U3.2 U3.7 U3.12 | length 3342
  Top Layer w30: U2.7 -927,-902 ; U3.7 -924,-1668 ; -922,-1568 U3.12 ; -913,-802 U2.12
  Top Layer w40: C4.2 -1101.6,-1418 U3.2 -959,-1418
  Top Layer w50: -1595.89,-473 -1579.89,-457 ; D12.1 -1104.6,-1286 ; -1144.3,-646.7 -1150.6,-653 -946,-653 -927,-672 -927,-902 ; C4.2 -1104.6,-1286 ; -959,-1418 -922,-1455 -922,-1568 -922,-1670 ; -927,-914 -927,-1127 -944,-1144 -1029,-1144 -1104.6,-1219.6 -1104.6,-1286 ; -924,-1668 -922,-1670 ; -922,-1929 -922,-1670
  Top Layer w60: -1620,-597 -1620,-497.11 -1595.89,-473 ; -1579.89,-457 -1249,-457 -1151.6,-554.4 -1151.6,-639.4 ; C13.2@-1287.2,-775 -1151.6,-639.4 ; -1144.3,-646.7 -1151.6,-639.4
  Bottom Layer w50: v1@-1617.9,-469 R3.1
  Bottom Layer w80: D1.2@-1617.9,-575 v1@-1617.9,-469
  other v1: -1607,-538 -1608,-507 -1610,-475
AGND: C1.2 C2.2 C3.2 C4.1 C11.2 C13.1 R4.1 R5.2 R7.2 U1.2 U1.4 | length 3946.6
  Top Layer w40: C3.2@-1476.5,-148 -1655,-148 -1895,-388 -1895,-793.93 -1775.93,-913 -1485.4,-913 -1391,-818.6 C11.2 ; C11.2@-1391,-577 C11.2@-1391,-562.11 ; v1(-1195,-953) -1195,-1056 v1(-1193,-1058) ; v1(-1194,-1352) -1194,-1400.4 C4.1
  Bottom Layer w30: C1.2@-1901,-663 -1733,-663 -1694,-702 -1694,-752.4 -1721.6,-780 U1.2 -1813,-780
  Bottom Layer w40: C1.2 -1916,-552 -1753,-389 -1463.05,-389 -1425.01,-427.05 R4.1@-1425.01,-581.41 ; R4.1 -1379,-585 -1197.4,-766.6 R5.2 -1197.4,-950.6 v1(-1195,-953) ; v1@-1193,-1351 v1(-1193,-1058)
  other v1: -1895,-539
DGND: R8.1 R9.1 R22.1 R23.1 R35.2 U2.6 U3.6 U4.1 U4.10 | length 2206.5
  Top Layer w20: R22.1 -1154,-1624 R23.1 ; v1(-1112,-928) -1110,-926 R8.1 ; R8.1@-1102,-852 U2.6 ; -1062,-1618 U3.6
  Top Layer w30: U4.10 -1656,-1496 -1642,-1482 ; U4.1 -1659,-1046 -1626,-1079 -1626,-1466 -1642,-1482 ; -1073,-1616 -1508,-1616 -1642,-1482
  Bottom Layer w30: v1(-1634,-1079) -1566.6,-1011.6 R35.2@-1091,-1011.6 ; R35.2@-1112,-999.6 v1(-1112,-928)
GND: P?.2 R5.1 R6.1 R35.1 R36.1 | length 2360
  Bottom Layer w60: R5.1@-1098,-869 -988,-869 ; R35.1@-1091,-1086.4 -957.6,-1086.4 ; -948,-1148 R36.1@-791,-1148
  Bottom Layer w120: P?.2 -978,-279.43 -978,-2051 -880.5,-2148.5
NetC1_1: C1.1 U1.3 | length 156
  Bottom Layer w20: C1.1 -1868,-731 ; -1867,-730 U1.3
NetC5_1: C5.1 D12.2 U3.1 | length 178.4
  Top Layer w20: U3.1 -1002.47,-1298.58 D12.2 -985.9,-1282 C5.1@-900.4,-1282
NetC5_2: C5.2 C12.2 P2.2 Q5.3 Q6.2 R25.2 U3.15 | length 1744.5
  Top Layer w20: C5.2@-825.6,-1282 -825.6,-1306.6 -851,-1332 -851,-1400 -833,-1418 U3.15 -745,-1418
  Top Layer w30: -745,-1418 -677,-1486 -677,-1784 -513.46,-1947.54 Q6.2
  Top Layer w40: R25.2 -393.14,-1685 Q5.3
  Top Layer w100: Q6.2 -337.5,-1844.55 -337.5,-1720.42 -246.66,-1629.57 P2.2@-93,-1629.57
  Bottom Layer w40: C12.2 -171.98,-1629.57 P2.2
NetC6_1: C6.1 D.2 U3.9 | length 229.6
  Top Layer w20: D.2@-785.6,-1946.3 -785.6,-1803 -782.47,-1799.88 U3.9
NetC6_2: C6.2 C12.1 P2.1 Q7.3 Q8.2 R31.2 U3.11 | length 1381.3
  Top Layer w20: v1(-823,-1752) -860.4,-1789.4 -860.4,-1803 -875,-1788.4 -875,-1652.33 -840.67,-1618 U3.11
  Top Layer w40: -227.4,-1825 P2.1@-101,-1825
  Top Layer w50: P2.1@-101,-1825 P2.1@-88,-1838
  Bottom Layer w30: v1(-823,-1752) -567.03,-1752
  Bottom Layer w40: Q7.3 -504.84,-1604 R31.2
  Bottom Layer w100: -553.5,-1682.35 -553.5,-1741.53 Q8.2
  Bottom Layer w120: Q8.2 -414.37,-1826.43 P2.1@-93,-1826.43
NetC14_1: C14.1 D2.2 U2.1 | length 185
  Top Layer w20: D2.2@-1011.9,-513 -1010.9,-514 C14.1@-910.4,-514 ; U2.1 D2.2@-1006,-518.9
NetC14_2: C14.2 C20.2 P1.2 Q1.3 Q2.2 R10.2 U2.15 | length 1279.8
  Top Layer w30: C14.2@-818.8,-530.8 -851.5,-563.5 -851.5,-626.5 -826,-652 U2.15 -633.03,-652 ; -632.03,-653 Q2.2
  Top Layer w40: R10.2 -403.07,-561 Q1.3
  Top Layer w120: Q2.2 -345.5,-737.55 -345.5,-679 ; -327.08,-661.57 P1.2@-89,-661.57
  Bottom Layer w30: C20.2@-220,-694.6 -172.98,-647.57 P1.2
NetC15_1: C15.1 D11.2 U2.9 | length 195.6
  Top Layer w20: D11.2 -779.9,-1042.3 C15.1 U2.9@-777.6,-960.4
NetC15_2: C15.2 C20.1 P1.1 Q3.3 Q4.2 R17.2 U2.11 | length 1433.1
  Top Layer w20: C15.2@-843,-1028 -843,-856 -839,-852 U2.11
  Bottom Layer w20: v1(-842,-931) -837,-936 -717,-936 -682,-901 -682,-768.48 -562.78,-649.25
  Bottom Layer w30: Q3.3@-549.53,-530 Q3.3@-545.53,-534
  Bottom Layer w40: Q3.3@-545.53,-534 Q3.3 -512.11,-508.58 R17.2
  Bottom Layer w120: -562.78,-543 -562.78,-649.25 Q4.2 -376.03,-836 P1.1@-111.43,-836
NetD1_1: D1.1 L1_220uH.2 U1.1 | length 1443.7
  Bottom Layer w20: D1.1 -1732,-585 -1651,-666 -1651,-770 -1711,-830 U1.1 -1759,-1338 -1699,-1398 -1408,-1398 L1_220uH.2@-1308,-1298
NetL1_220uH_1: L1_220uH.1 R1.2 R2.1 U1.7 | length 730.8
  Bottom Layer w20: L1_220uH.1@-1639.4,-1276.4 L1_220uH.1 ; U1.7 R1.2@-1403.4,-780
  Bottom Layer w30: L1_220uH.1@-1605,-1190 -1699.4,-1095.6 -1699.4,-922 -1699.4,-887.4 -1592,-780 U1.7
NetLED?_2: LED?.2 R7.1 | length 80.4
  Top Layer w40: R7.1@-1755,-837 -1676,-837 LED?.2
NetQ1_1: Q1.1 R10.1 R11.2 T5.1 | length 212.5
  Top Layer w20: T5.1 Q1.1@-542.67,-601 ; Q1.1 -526.67,-617 R11.2 -474,-621 R10.1
NetQ2_1: Q2.1 R13.2 R14.1 T6.1 | length 241.6
  Top Layer w20: T6.1 -569.58,-1096.42 Q2.1 -510.67,-1122 R13.2 R14.1@-424,-1122
NetQ3_1: Q3.1 R16.2 R17.1 T7.1 | length 510.4
  Bottom Layer w20: T7.1 -631,-369.33 -567.33,-433 -417,-433 -362,-488 Q3.1 -390.58,-566.58 R16.2 -421.28,-568.58 R17.1
NetQ4_1: Q4.1 R19.2 R20.1 T8.1 | length 510.5
  Bottom Layer w20: T8.1 -568.57,-917.43 -410.57,-917.43 -356.72,-971.28 Q4.1 -383.31,-1050 R19.2 -418,-1052 R20.1
NetQ5_1: Q5.1 R24.2 R25.1 T2.1 | length 213.2
  Top Layer w20: T2.1 -537.25,-1748 -418,-1748 R25.1
NetQ6_1: Q6.1 R27.2 R28.1 T1.1 | length 222.5
  Top Layer w20: T1.1 -537,-2206 -517,-2226 R27.2 -467,-2229 R28.1
NetQ7_1: Q7.1 R30.2 R31.1 T3.1 | length 489.1
  Bottom Layer w20: T3.1 -630.43,-1529.43 -409.57,-1529.43 -356.72,-1582.28 Q7.1 -385.31,-1664 R31.1
NetQ8_1: Q8.1 R33.2 R34.1 T4.1 | length 549
  Bottom Layer w20: T4.1 -651,-1940 -585.57,-2005.43 -391.57,-2005.43 -351.72,-2045.28 Q8.1 -380.31,-2140 R33.2 -418,-2142 R34.1
NetR2_2: R2.2 U1.8 | length 154.6
  Bottom Layer w30: -1594.6,-952 -1572,-952 -1519,-899 U1.8@-1519,-842
NetR3_2: R3.2 R4.2 U1.5 | length 226.9
  Bottom Layer w20: U1.5 -1519,-600.6 R4.2 -1496,-577.6 -1496,-484.4 R3.2
NetR8_2: R8.2 U2.5 | length 84
  Top Layer w20: -1090,-802 U2.5
NetR9_2: R9.2 U2.8 | length 98.8
  Top Layer w20: R9.2@-1092,-983 -1037,-983 U2.8
NetR11_1: R11.1 T5.2 U2.16 | length 345.1
  Top Layer w20: U2.16 -744,-602 T5.2@-643,-501 ; T5.2@-620,-513 -595.5,-513 -546.5,-513 -522,-513 R11.1
NetR13_1: R13.1 T6.2 U2.14 | length 514.7
  Top Layer w20: U2.14 -765.75,-702 -630,-837.75 T6.2 -562,-1004 -536,-1004 R13.1
NetR16_1: R16.1 T7.2 U2.10 | length 784.1
  Top Layer w20: U2.10 -734,-902 v1(-733,-903)
  Bottom Layer w20: v1(-733,-903) -733,-555 T7.2 -621,-463 -455.08,-463 -419.28,-498.8 R16.1
NetR19_1: R19.1 T8.2 U2.13 | length 760.3
  Top Layer w20: v2(-840,-753) U2.13@-787,-753
  Bottom Layer w20: v2(-840,-753) -875,-788 -875,-944.67 -848.67,-971 -651,-971 T8.2 -633,-952 -442,-952 -416,-978 R19.1
NetR22_2: R22.2 U3.5 | length 157.4
  Top Layer w20: R22.2 -1150,-1568 U3.5
NetR23_2: R23.2 U3.8 | length 172.2
  Top Layer w20: R23.2 -1052.47,-1768 U3.8
NetR24_1: R24.1 T2.2 U3.16 | length 562.6
  Top Layer w20: U3.16 -706,-1368 -704,-1370 -701,-1370 -628,-1443 -628,-1657.11 -510.27,-1657.11 -481.38,-1686 R24.1
NetR27_1: R27.1 T1.2 U3.14 | length 898.6
  Top Layer w20: U3.14 -759,-1468 -714,-1513 -714,-2020 T1.2 -530,-2106 R27.1
NetR30_1: R30.1 T3.2 U3.10 | length 539.8
  Top Layer w20: v1(-837,-1668) U3.10
  Bottom Layer w20: v1(-837,-1668) -669,-1668 ; -667,-1666 T3.2 -637,-1612 -589,-1564 -450.22,-1564 R30.1@-419,-1595.22
NetR33_1: R33.1 T4.2 U3.13 | length 997.3
  Top Layer w20: v1(-854,-1515) -785.47,-1515 U3.13
  Bottom Layer w20: v1(-854,-1515) -871,-1515 -871,-1875 -705,-2041 -442,-2041 -416,-2067 R33.1
PGND: Q2.3 Q4.3 Q6.3 Q8.3 R6.2 R14.2 R20.2 R28.2 R34.2 R36.2 | length 3288.2
  Top Layer w40: R14.2 -386.14,-1067 Q2.3 ; R28.2 -387.14,-2169 Q6.3
  Top Layer w60: v1@-345,-1195 -331,-1181 -331,-1081
  Top Layer w65: v1(-525,-1195) v1@-345,-1195
  Top Layer w100: v1(-460,-2326) -377,-2326 -321,-2270 -321,-2224
  Bottom Layer w40: Q4.3@-554,-992 R20.2 ; Q8.3 -501.84,-2082 R34.2
  Bottom Layer w80: R6.2@-716.8,-2174.8 -706.6,-2185 -572,-2185 ; R36.2@-686,-1148 -595,-1148 ; -572,-2195 -572,-2185 ; -550.57,-2119 -550.57,-2163.57 -572,-2185 ; -549,-1180 -549,-1194 -401,-1194 ; -396,-1195 -257,-1195
  Bottom Layer w100: -572,-2195 -476,-2291 -317,-2291 80,-1894 80,-1532 -257,-1195 ; -555.5,-1023.42 -555.5,-1173.5 -549,-1180
  other v1: -425,-2326 -390,-2326 -354,-2326 -487,-1195 -452,-1195 -416,-1195 -377,-1195 -338,-1195
PWM1: P3.5 U4.2 | length 207.1
  Top Layer w20: P3.5 U4.2
PWM2: P3.4 U4.4 | length 207.1
  Top Layer w20: P3.4 U4.4
PWM3: P3.3 U4.6 | length 207.1
  Top Layer w20: P3.3 U4.6
PWM4: P3.2 U4.8 | length 207.1
  Top Layer w20: P3.2 U4.8
PWMOUT1: U2.3 U4.18 | length 711.1
  Top Layer w20: U4.18 -1267,-1146 -1235,-1114 -1235,-800 -1137,-702 U2.3 U2.3@-1007.53,-703.53
PWMOUT2: U2.4 U4.16 | length 770.1
  Top Layer w20: U4.16 -1248,-1246 -1153,-1151 -1153,-768 -1137,-752 U2.4
PWMOUT3: U3.3 U4.14 | length 411.9
  Top Layer w20: U4.14 -1311.56,-1346 -1259,-1398.56 -1259,-1426 -1215.47,-1469.53 U3.3@-1002.47,-1469.53
PWMOUT4: U3.4 U4.12 | length 374.4
  Top Layer w20: U4.12 -1303,-1446 -1231,-1518 U3.4
VCC: C3.1 C11.1 LED?.1 P?.1 Q1.2 Q3.2 Q5.2 Q7.2 R1.1 U1.6 | length 3932.2
  Top Layer w40: LED?.1 -1575,-746 -1770,-551 -1770,-369 -1705,-304 C11.1@-1411,-304
  Top Layer w100: Q1.2 -177.46,-346.54 96,-620 96,-919.05 Q5.2
  Top Layer w120: -1341.5,-290 -1341.5,-191 -1239.5,-89 -945,-89 P?.1@-826.29,-207.71
  Bottom Layer w30: U1.6@-1504,-729 -1420,-729
  Bottom Layer w40: v1(-1609,-712) v2(-1590,-731) ; v2@-1591,-730 U1.6
  Bottom Layer w120: P?.1@-819.57,-247 -484.89,-247 Q3.2
  other v1: -537,-1382 -505,-1382 -473,-1382 -442,-1382 -410,-1382 -378,-1382 -537,-1321 -506,-1321 -474,-1321 -442,-1321 -410,-1321 -378,-1321 -537,-1266 -506,-1266 -474,-1266 -442,-1266 -410,-1266 -378,-1266 -535,-273 -501,-273 -467,-273 -435,-273 -403,-273 -371,-273 -539,-219 -502,-219 -469,-219 -436,-219 -404,-219 -372,-219 -536,-168 -504,-168 -472,-168 -439,-168 -406,-168 -372,-168
pads on no net: U4.3 U4.5 U4.7 U4.9 U4.11 U4.13 U4.15 U4.17 U4.19

## Keep-outs
Keep-Out Layer:
  lines w10: -2027,-203 -2027,-2260 ccw(c-1831,-2232) -1860.12,-2427.84 ; -2025.92,-202.9 cw(c-1840,-186) -1824,0 0,0 cw(c1,-185) 186,-185 ; -1860,-2427 11,-2427 ccw(c23,-2266) 183.85,-2252.18 ; 186,-2252 186,-186

## Other copper
Top Layer:
  rectangle net VCC: -558,-215 -342,-147
  rectangle net VCC: -556,-1340 -339,-1246
  text "2018.05.02" at -1789,-2153 h118.11 r90
  text "集美大学" at -1673,-2153 h118.11 r90
  text "正月元宵队" at -1900,-2159 h118.11 r90

## Silkscreen, mask and mechanical layers (free items; w line width, h text height)
Top Overlay:
  text "-" at -1001,-29 h118.11 r180
  text "+" at -771,-79 h118.11 r90
  text "." at -1865,-1063 h118.11 r90
  text "+" at -1812,-1530 h118.11 r90
Top Solder:
  rectangle: -2006,-2185 -1642,-1600

## Text inside footprints (layer, text, board x,y; h text height)
P1: Top Overlay "V" at 37.11,-864.11 h50 r90; Top Overlay "V" at 37.11,-667.26 h50 r90
P2: Top Overlay "V" at 40.11,-1846.11 h50 r90; Top Overlay "V" at 40.11,-1649.26 h50 r90
P?: Top Overlay "V" at -993.74,-125.89 h50 r180; Top Overlay "V" at -796.89,-125.89 h50 r180